# Altium PCB Siren.PcbDoc
Units mil, origin at the board's own origin, x right, y up, seen from the top; angles counter-clockwise.
Board outline 2080 x 1930 mil, 4 copper layers (Top Layer, Internal Plane 1, Internal Plane 2, Bottom Layer), stack 30.634 mil thick; 42 components, 27 nets, 172 pads, 44 vias.
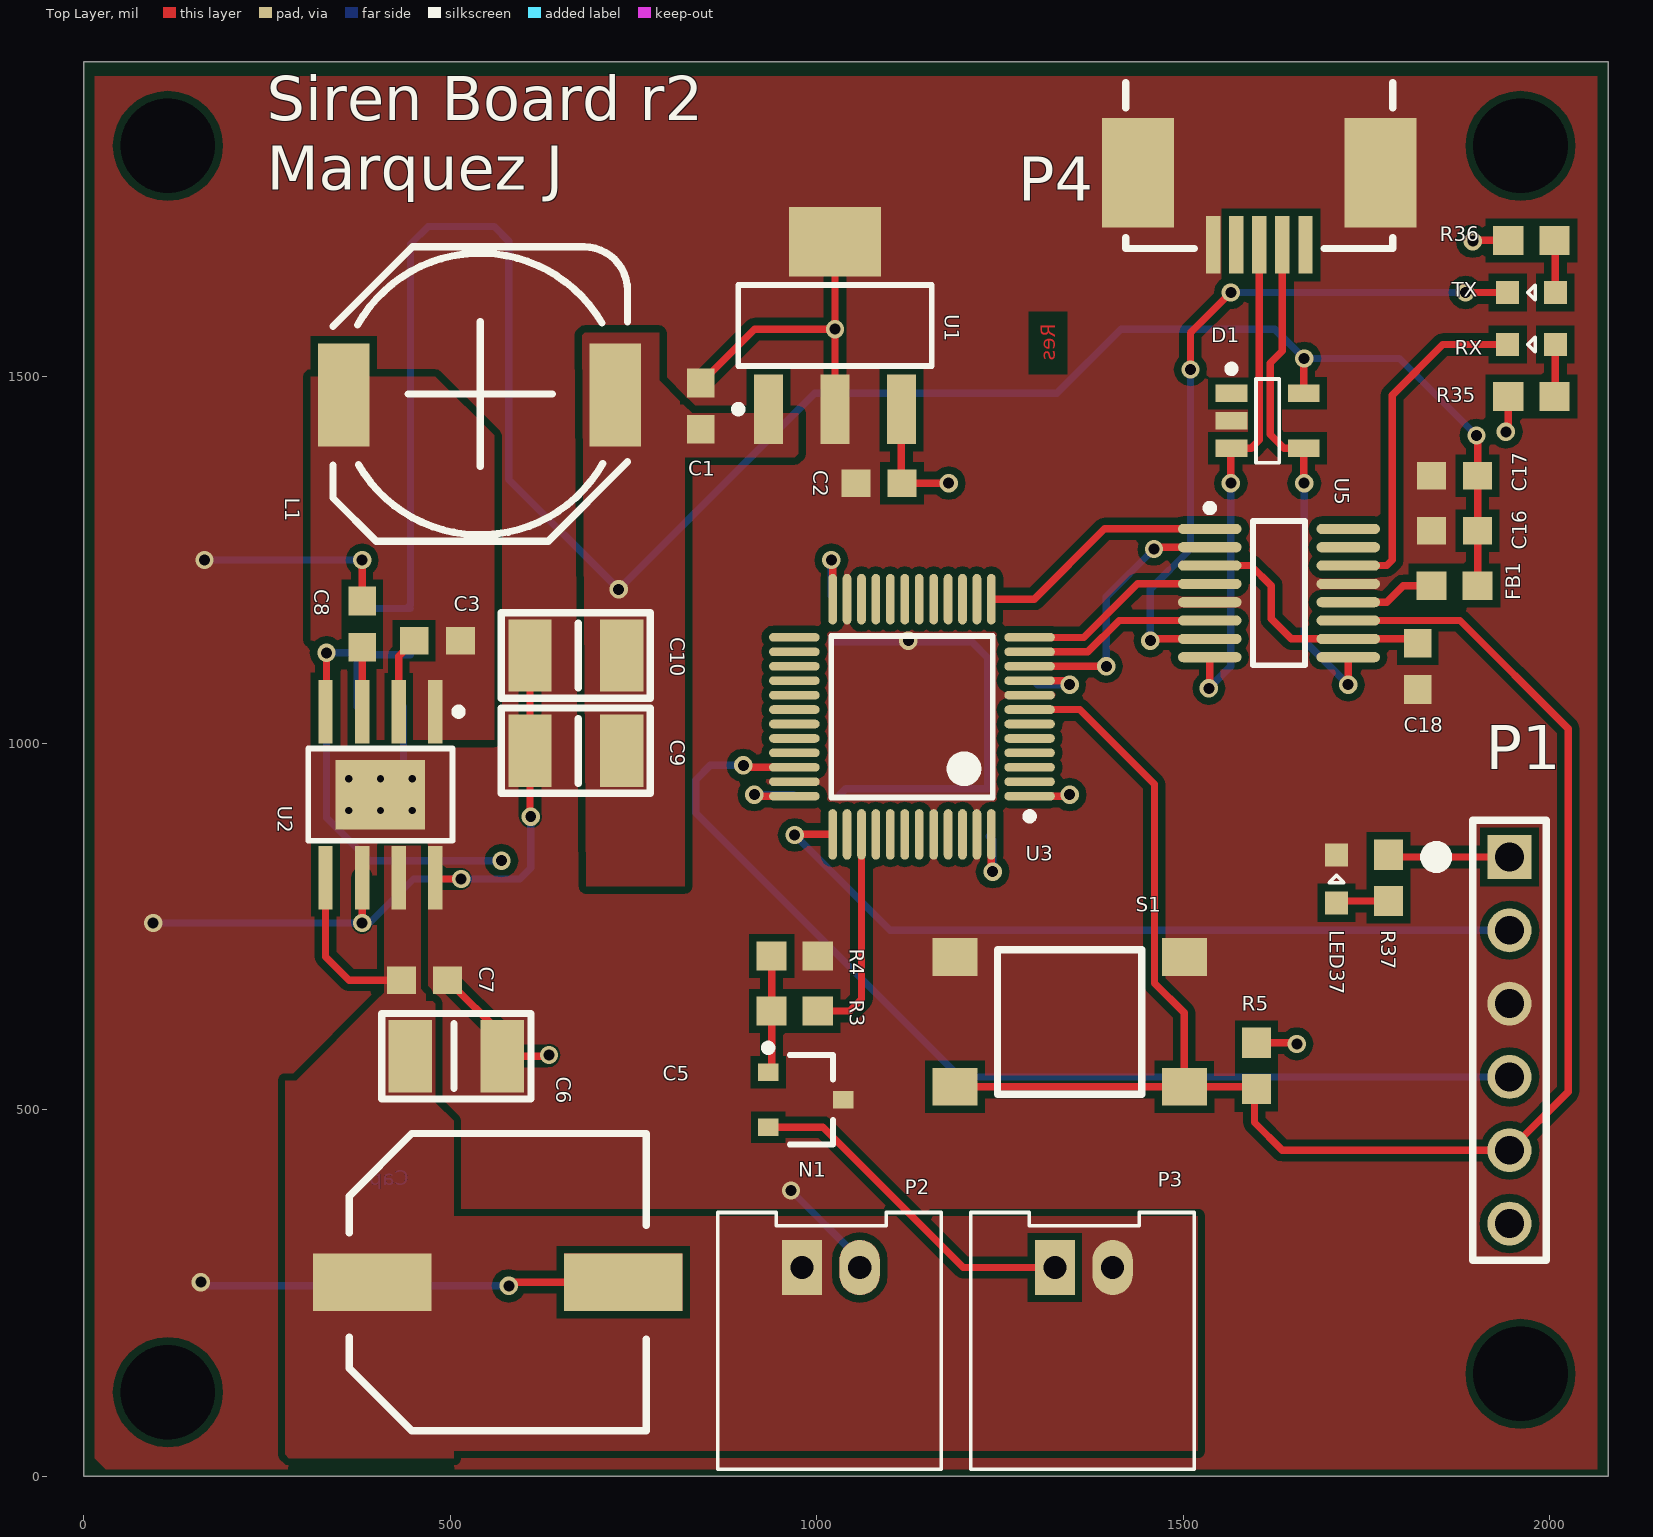
[diagram p0: Top Layer view]
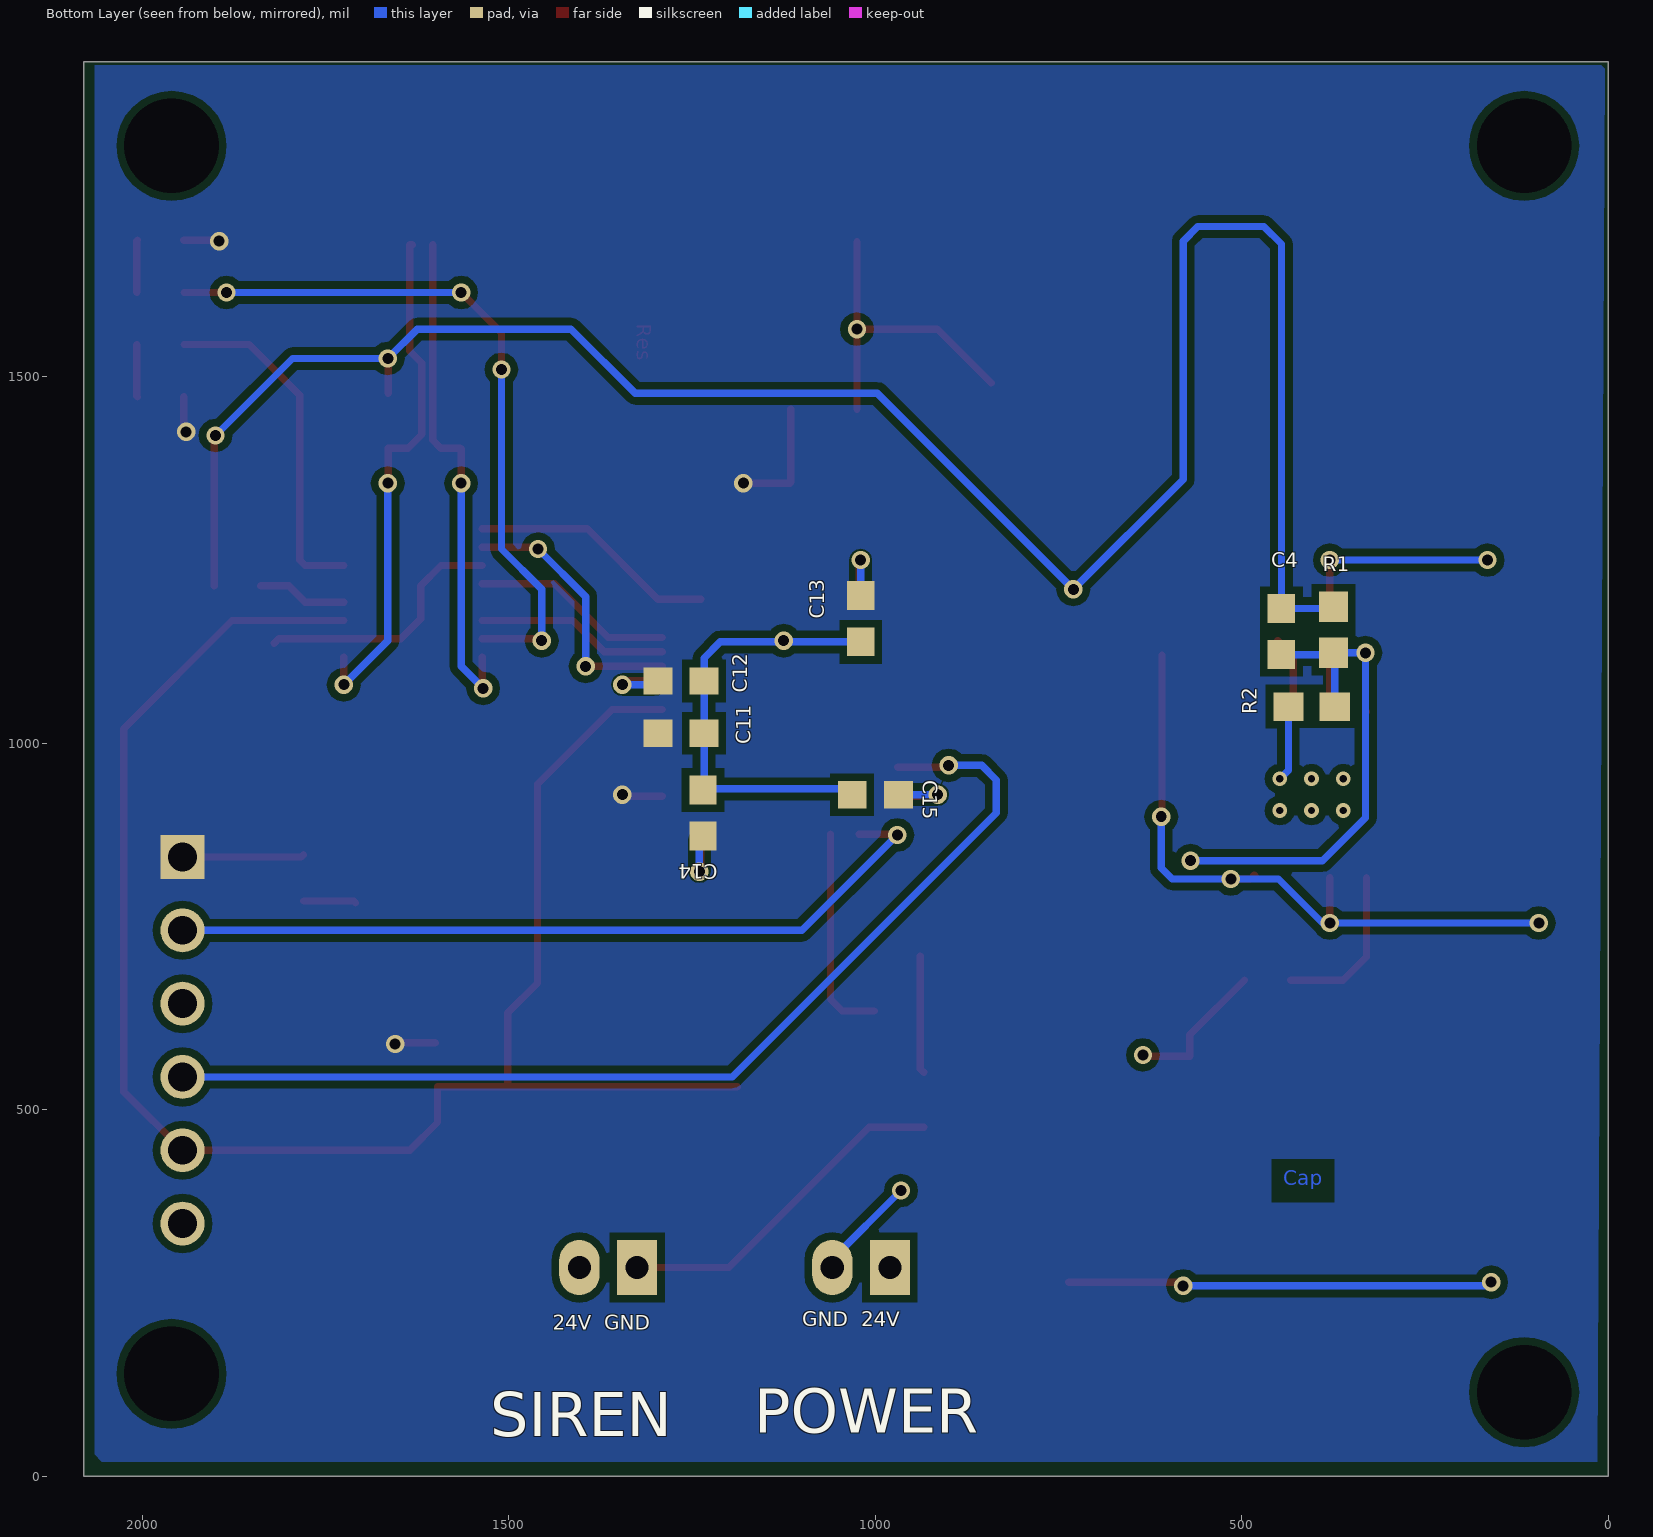
[diagram p1: Bottom Layer view, seen from below]
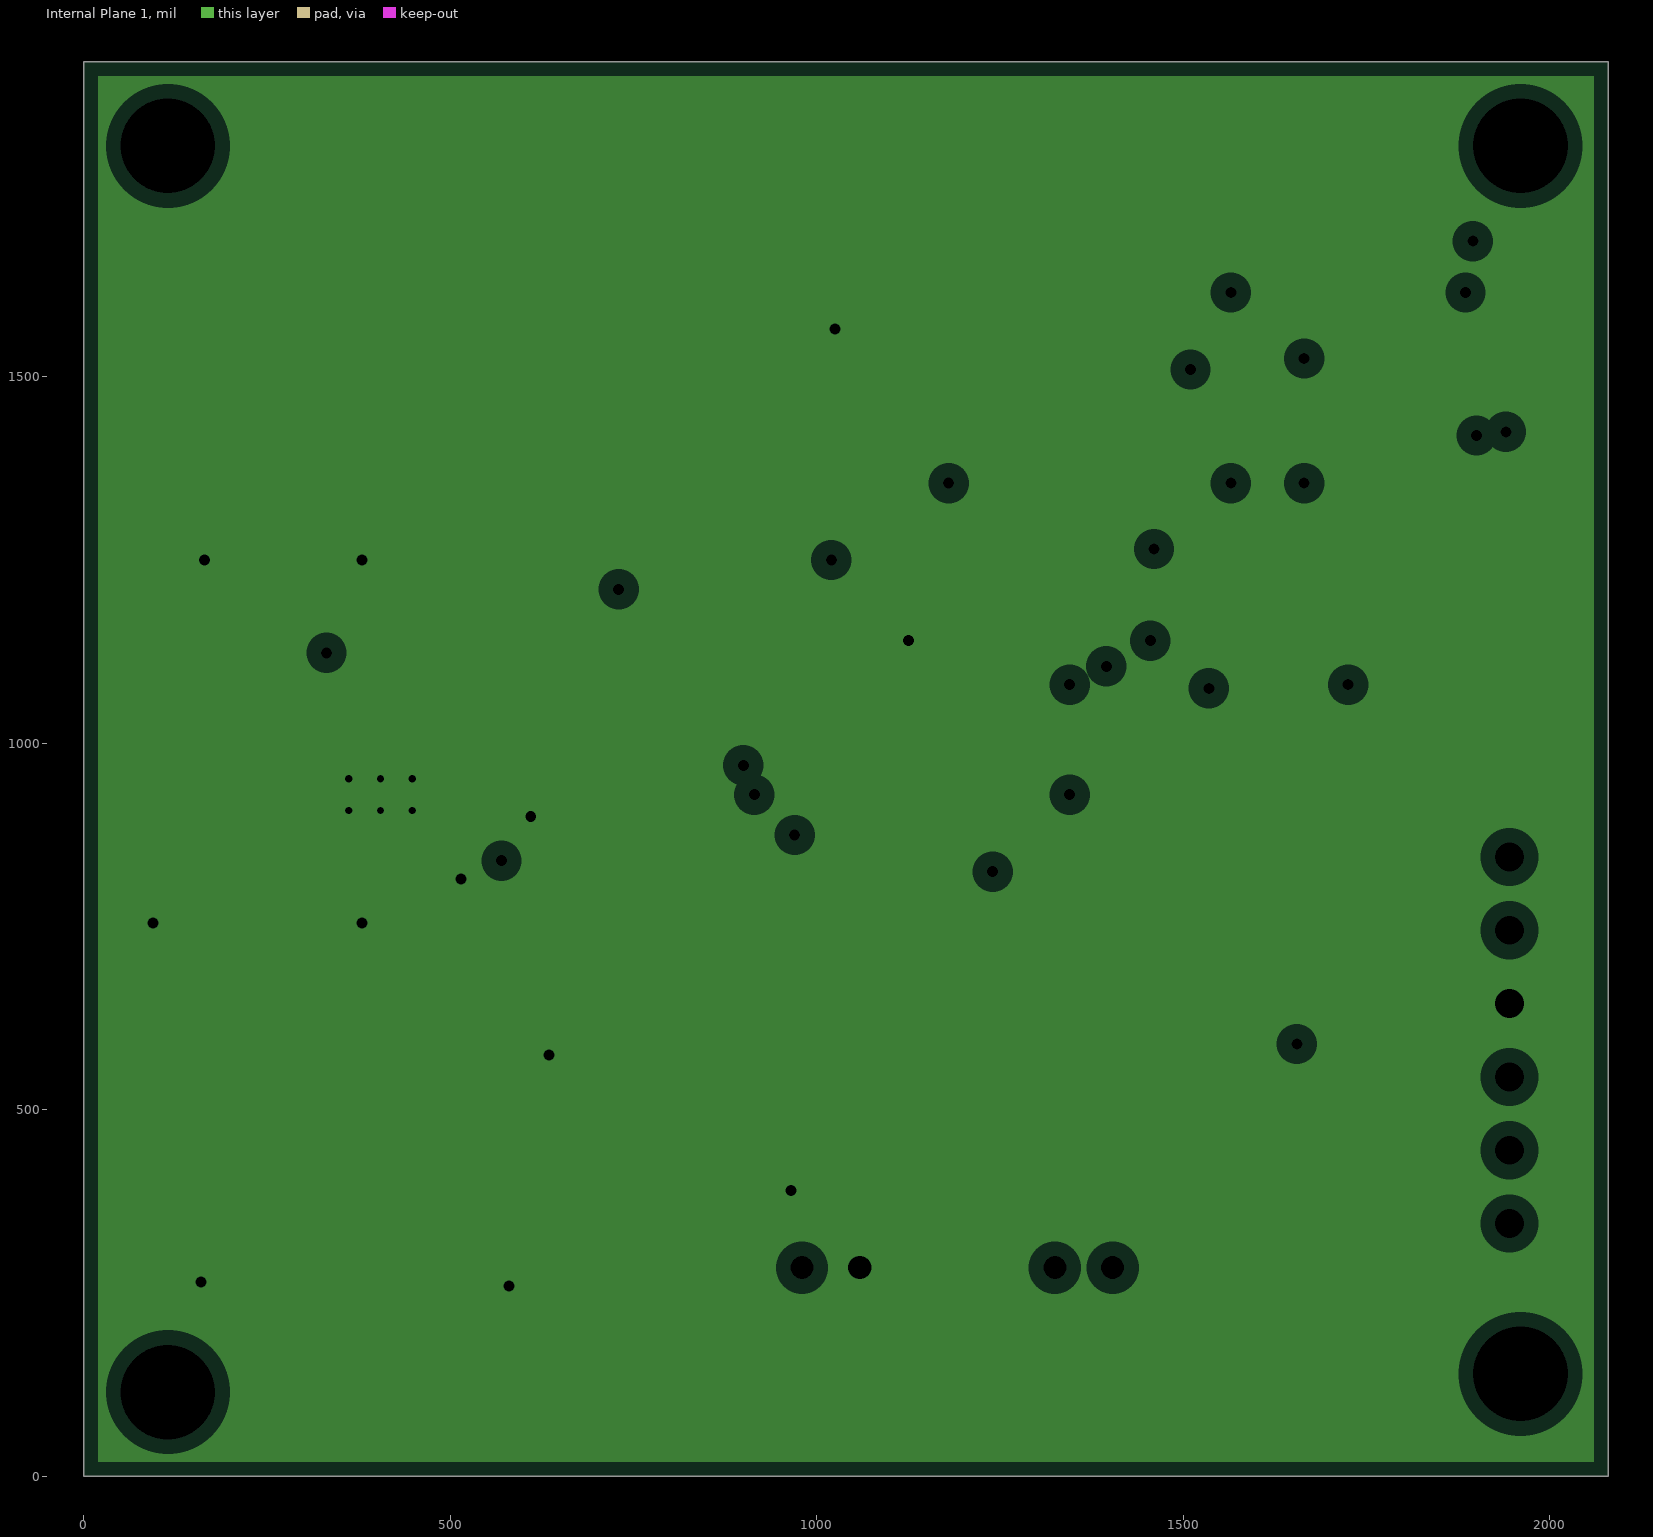
[diagram p2: Internal Plane 1, clearances drawn from the general rule]
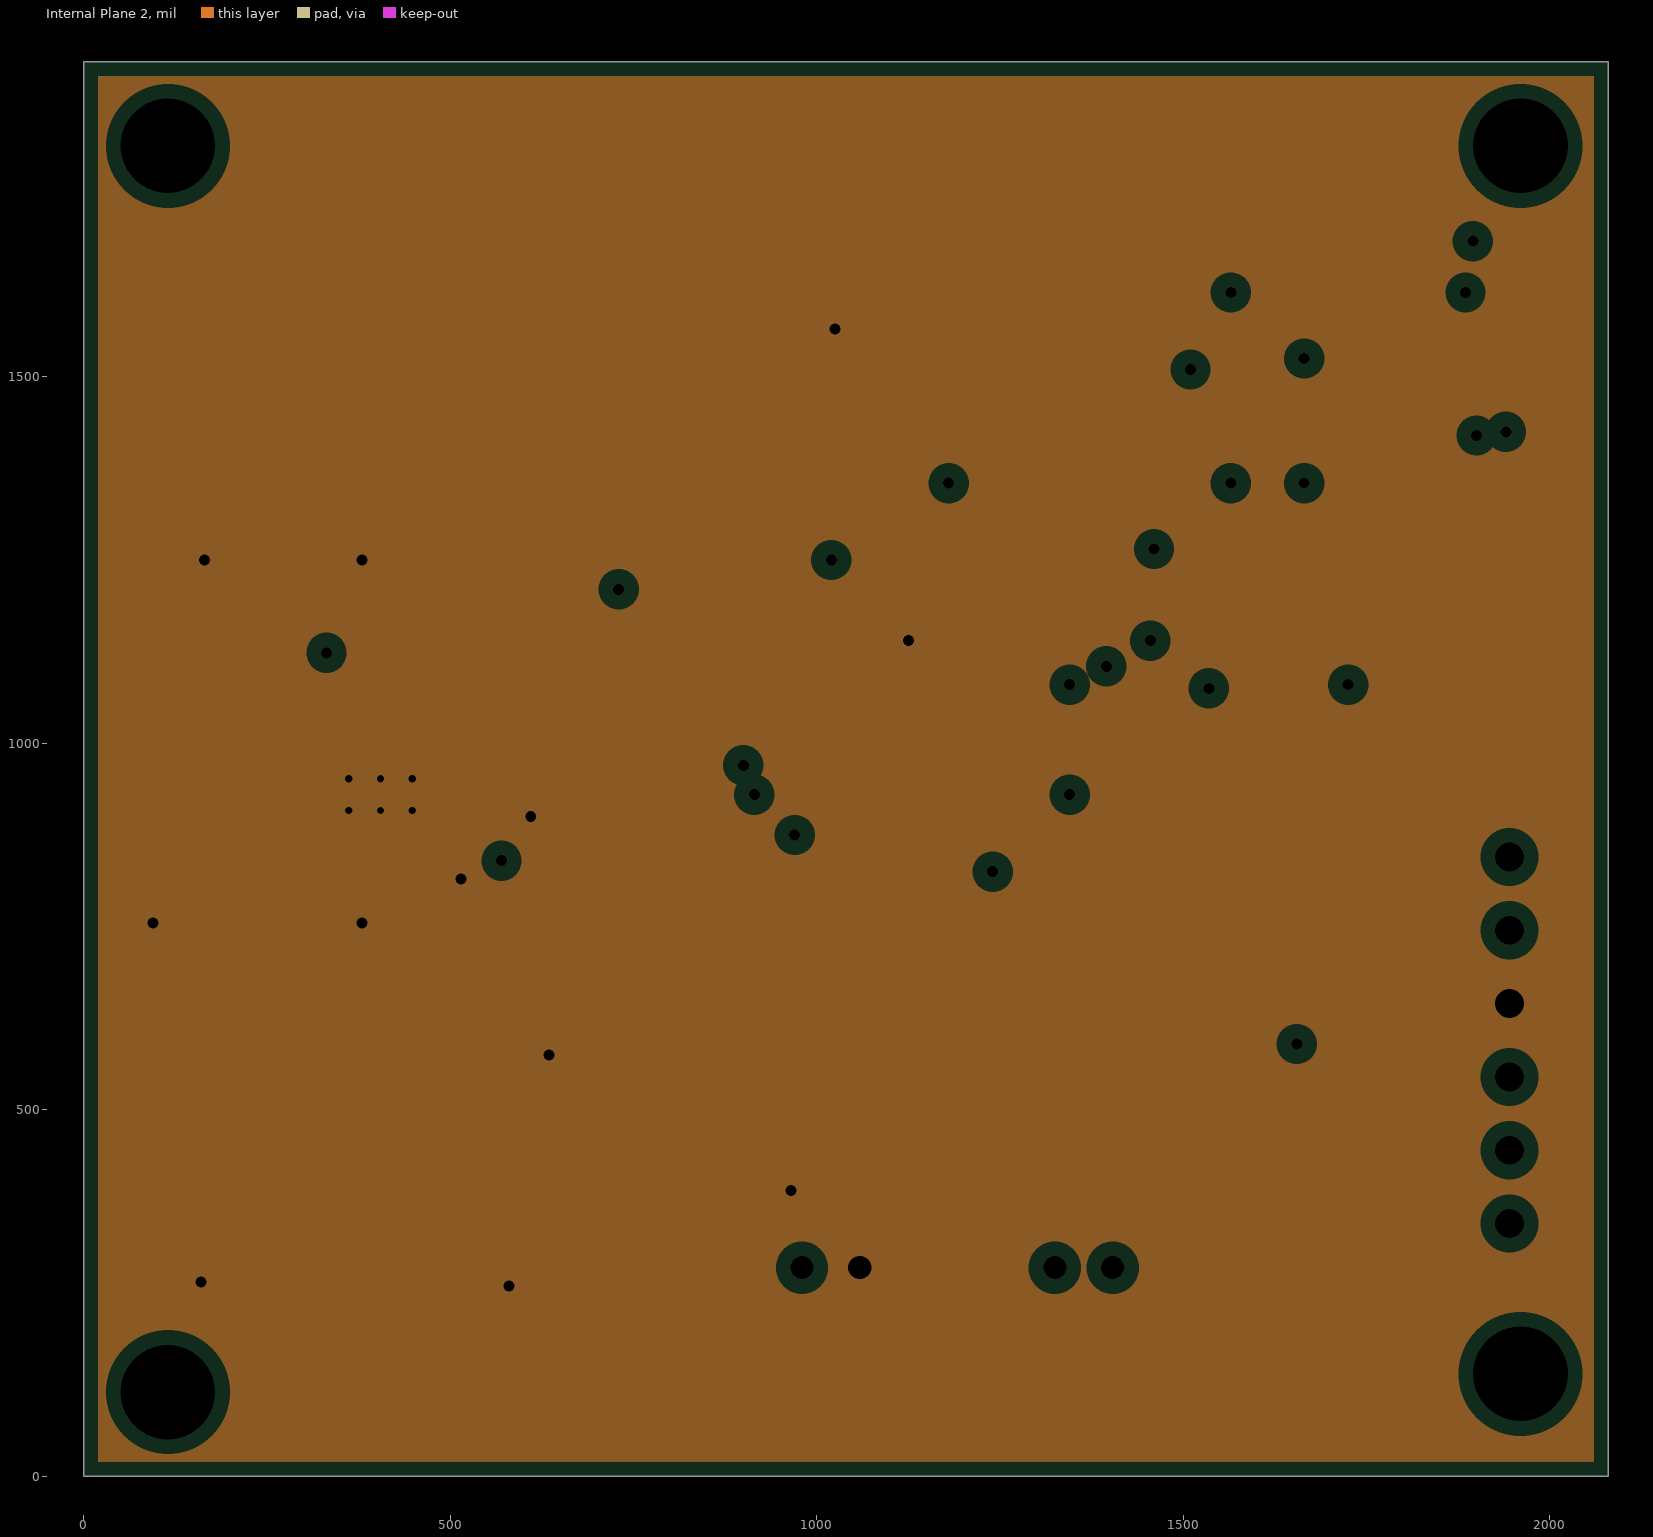
[diagram p3: Internal Plane 2, clearances drawn from the general rule]

## Layer stack, top to bottom
Top Solder: solder mask 0.4, Solder Resist, Dk 3.5
Top Layer: signal copper 1.4
Dielectric 1: core 10, FR-4, Dk 4.2
Internal Plane 1: plane copper 1.417, net GND
Dielectric 3: prepreg 5, Dk 4.2
Internal Plane 2: plane copper 1.417, net GND
Dielectric 2: core 10, Dk 4.2
Bottom Layer: signal copper 1.4
Bottom Solder: solder mask 0.4, Solder Resist, Dk 3.5

## Board outline
2080,1930 0,1930 0,0 2080,0

## Design rules (kind name [scope] priority, off if disabled: settings)
Clearance [All] p1: gap=10 ignorepadtopadclearanceinfootprint=FALSE except(0: Arc-Hole Track-Hole SMDPad-Hole THPad-Hole Via-Hole Fill-Hole Poly-Hole Region-Hole Text-Hole; 5: Track-Track Track-SMDPad SMDPad-SMDPad; 7: Track-Via)
HoleSize [All] p1: absolutevalues=TRUE maxlimit=150 minlimit=10 maxpercent=80.000 minpercent=20.000
MinimumAnnularRing [All] p1: minimumring=5
MinimumSolderMaskSliver [All] p1: minsoldermaskwidth=1
PlaneClearance [All] p1: clearance=20
PlaneConnect [All] p1: planeconnectstyle=Relief reliefexpansion=20 reliefentries=4 reliefconductorwidth=10 reliefairgap=10
PolygonConnect [All] p1: connectstyle=Direct reliefconductorwidth=10 reliefentries=4 polygonreliefangle="90 Angle" airgapwidth=10
RoutingVias [All] p1: holewidth=10 width=22 viastyle="Through Hole" minholewidth=10 minwidth=22 maxholewidth=100 maxwidth=150
SilkToSolderMaskClearance [IsPad] p1: minsilkscreentomaskgap=5 clearancetoexposedcopper=TRUE
SolderMaskExpansion [All] p1: expansion=4
Width [All] p1: maxlimit=150 minlimit=8 preferedwidth=10
25 further rules are at their usual default settings.

## Classes and differential pairs
component class Siren_Board: C11 C12 C13 C14 C15 C16 C17 C18 D1 FB1 LED37 N1 P1 P3 P4 R3 R4 R5 R35 R36 R37 RX S1 TX U3 U5
component class 24Vto5Vat1A-R1: C3 C5 C6 C7 C8 C9 C10 L1 P4 R1 R2 U2
component class 5Vto3V3_Power_Connector: C1 C2 U1

## Components (designator, comment, footprint, x,y, rotation, side; value= is the part's Value field where it differs from the comment)
C1 "Cap" CAPC0603 841.76,1460 r90 top value=1uF
C2 "Cap" CAPC0603 1085,1355 r180 top value=1uF
C3 "Cap" CAPC0603 482.53,1140 r0 top value=470nF
C4 "Cap" CAPC0603 446.03,1152.53 r270 bottom
C5 "EEHZA1H101P" EEHZA1H101P 565,265 r90 top value=100uF
C6 "Cap" CAP1210 445,573.28 r180 top value=10uF
C7 "Cap" CAPC0603 465,677.07 r0 top value=100nF
C8 "Cap" CAPC0603 380,1162.51 r90 top value=10uF
C9 "Cap" CAP1210 735,990 r0 top value=47uF
C10 "Cap" CAP1210 735,1120 r0 top value=47uF
C11 "Cap" CAPC0603 1265,1013.97 r180 bottom value=1uF
C12 "Cap" CAPC0603 1265,1085 r180 bottom value=10nF
C13 "Cap" CAPC0603 1020,1170 r270 bottom value=100nF
C14 "Cap" CAPC0603 1235,905 r90 bottom value=100nF
C15 "Cap" CAPC0603 1000,930 r0 bottom value=100nF
C16 "Cap" CAPC0603 1870,1290 r180 top value=4.7uF
C17 "Cap" CAPC0603 1870,1365 r180 top value=100nF
C18 "Cap" CAPC0603 1820,1105 r270 top value=100nF
D1 "824011" SOT95P280X116-5N 1615,1440 r0 top
FB1 "FBead" RES0603 1870,1215 r180 top
L1 "MSS1048-563MLB" MSS1048-563MLB 540,1475 r90 top value=56uH
LED37 "LED" LED0603 1708.97,815 r90 top
N1 "SSM3K329R,LF" SSM3K329R,LF 985,513.77 r0 top
P1 "SWD" SWD_STM32 1945,845 r0 top
P2 "2-pin Horz Sherlock" MOLEX-HDR-1X2-SHERLOCK-HORZ 980,285 r180 top
P3 "2-pin Horz Sherlock" MOLEX-HDR-1X2-SHERLOCK-HORZ 1325,285 r180 top
P4 "UX60SC-MB-5ST" UX60SC-MB-5ST 1603.75,1680 r180 top (schematic designator P1)
R1 "Res" RES0603 375,1155 r270 bottom value=40.2k
R2 "Res" RES0603 405,1050 r0 bottom value=10k
R3 "Res" RES0603 970,635 r180 top value=100
R4 "Res" RES0603 970,710 r0 top value=10k
R5 "Res" RES0603 1600,560 r270 top value=1k
R35 "Res" RES0603 1975,1472.93 r0 top value=10k
R36 "Res" RES0603 1975,1686.03 r0 top value=10k
R37 "Res" RES0603 1780,816.5 r270 top value=10k
RX "LED" LED0603 1975,1543.97 r180 top
S1 "Button" PTS645xxxxSMTR92 1345,620 r180 top
TX "LED" LED0603 1975,1615 r180 top
U1 "3.3V LDO Reg" SOT23-4n 1025,1570 r90 top
U2 "LMR23610ADDAR" LMR23610ADDAR 405,930 r270 top
U3 "STM32F072CB" STM32F072CB 1130,1036.23 r180 top
U5 "FT230XS" FT230XS 1630.64,1205 r0 top

## Footprints (in the part's own frame and the unit in brackets; to place one, negate y for a bottom-side part, rotate by r counter-clockwise, add the part's x,y. Pads: shape width x height; smd on the part's side, far side on the other; paste and mask are expansions set on the pad)
CAP1210 [mm]
  rect 1.5x2.5 smd: 1(-0.02,0) 2(-3.2,0)
  silkscreen extent -4.2,-1.48 0.97,1.48, body extent -3.22,-1.25 0,1.26, height 2.5
CAPC0603 [mm] "Chip Capacitor, 2-Leads, Body 1.60x0.80mm, IPC Medium Density"
  rect 1x0.95 smd: 1(-0.8,0) 2(0.8,0)
  body extent -0.88,-0.48 0.87,0.48, height 0.8
EEHZA1H101P [mm] "CAP ALUM POLY HYB 100UF 50V SMD"
  rect 2x4.1 smd: 1(0,4.35) 2(0,-4.35)
  silkscreen extent -5.15,-5.15 5.15,5.15, body extent -5.24,-5.99 5.25,5.99, height 10.54
FT230XS [mm] "SOP, 16-Leads, Body 4.90x3.90mm, Pitch 0.64mm, IPC Medium Density"
  oval 2.2x0.35 smd: 1(-2.4,2.222) 2(-2.4,1.587) 3(-2.4,0.953) 4(-2.4,0.318) 5(-2.4,-0.318) 6(-2.4,-0.953) 7(-2.4,-1.587) 8(-2.4,-2.222) 9(2.4,-2.222) 10(2.4,-1.587) 11(2.4,-0.953) 12(2.4,-0.318) 13(2.4,0.318) 14(2.4,0.953) 15(2.4,1.587) 16(2.4,2.222)
  silkscreen extent -2.52,-2.5 0.9,3.07, body extent -2,-2.5 2,2.5, height 1.76
LED0603 [mm] "Chip LED, 2-Leads, Body 1.60x0.80mm, IPC Medium Density"
  rect 0.8x0.8 smd: A(-0.825,0) C(0.825,0)
  silkscreen extent -0.13,-0.25 0.12,0.25, body extent -0.88,-0.48 0.87,0.47, height 0.8
LMR23610ADDAR [mm] "IC REG BUCK ADJ 1A SYNC 8SOPWRPD"
  rect 2.2x0.5 smd: 1(-2.875,1.905) 2(-2.875,0.635) 3(-2.875,-0.635) 4(-2.875,-1.905) 5(2.875,-1.905) 6(2.875,-0.635) 7(2.875,0.635) 8(2.875,1.905)
  rect 2.4x3.1 smd: 9(0,0)
  silkscreen extent -3,-2.5 1.6,2.83, body extent -2,-2.5 2,2.5, height 1.7
MOLEX-HDR-1X2-SHERLOCK-HORZ [mm]
  rect 1.397x1.905 hole 0.8: 1(0,0)
  oval 1.397x1.905 hole 0.8: 2(-2,0)
  silkscreen extent -4.83,-1.91 2.92,6.98, body extent -4.83,-1.91 2.87,8.59, height 5.54
MSS1048-563MLB [mm] "FIXED IND 56UH 1.7A 126 MOHM"
  rect 3.56x1.78 smd: 1(0,4.7) 2(0,-4.7)
  silkscreen extent -5.06,-5.13 5.14,5.07, body extent -5.1,-5.15 5.1,5.15, height 5
PTS645xxxxSMTR92 [mm] "PTS645 Series SMT 6 mm Tactile Switch"
  rect 1.555x1.3 smd: A(-3.975,-2.25) A(3.975,-2.25) B(-3.975,2.25) B(3.975,2.25)
  silkscreen extent -2.5,-2.5 2.5,2.5, body extent -3,-3 3,3, height 4.5
RES0603 [mm] "Chip Resistor, 2-Leads, Body 1.60x0.80mm, IPC Medium Density"
  rect 1.05x1 smd: 1(-0.8,0) 2(0.8,0)
  body extent -0.88,-0.48 0.87,0.47, height 0.8
SOT23-4n [mm] "SOT223, 4-Leads, Body 6.50x7.00mm (avg), Pitch 2.30mm, IPC Medium Density"
  rect 2.4x1 smd: 1(-2.9,2.3) 2(-2.9,0) 3(-2.9,-2.3)
  rect 2.4x3.2 smd: 4(2.9,0)
  silkscreen extent -3.02,-3.35 1.4,3.47, body extent -1.85,-3.35 1.85,3.35, height 1.7
SOT95P280X116-5N [mm] "SOT23, 5-Leads, Body 2.90x2.80mm, Pitch 0.95mm, IPC Medium Density"
  rect 1.1x0.6 smd: 1(-1.25,0.95) 2(-1.25,0) 3(-1.25,-0.95) 4(1.25,-0.95) 5(1.25,0.95)
  silkscreen extent -1.37,-1.45 0.4,1.92, body extent -0.8,-1.45 0.8,1.45, height 1.16
SSM3K329R,LF [mm] "MOSFET N CH 30V 3.5A 2-3Z1A"
  rect 0.7x0.6 smd: 1(-1.3,0.95) 2(-1.3,-0.95) 3(1.3,0)
  silkscreen extent -1.42,-1.55 0.95,1.92, body extent -0.95,-1.55 0.95,1.55, height 0.8
STM32F072CB [mm] "TSQFP, 48-Leads, Body 7.00x7.00mm, Pitch 0.50mm, IPC Medium Density"
  oval 1.75x0.3 smd: 1(-4.075,2.75) 2(-4.075,2.25) 3(-4.075,1.75) 4(-4.075,1.25) 5(-4.075,0.75) 6(-4.075,0.25) 7(-4.075,-0.25) 8(-4.075,-0.75) 9(-4.075,-1.25) 10(-4.075,-1.75) 11(-4.075,-2.25) 12(-4.075,-2.75) 25(4.075,-2.75) 26(4.075,-2.25) 27(4.075,-1.75) 28(4.075,-1.25) 29(4.075,-0.75) 30(4.075,-0.25) 31(4.075,0.25) 32(4.075,0.75) 33(4.075,1.25) 34(4.075,1.75) 35(4.075,2.25) 36(4.075,2.75)
  oval 0.3x1.75 smd: 13(-2.75,-4.075) 14(-2.25,-4.075) 15(-1.75,-4.075) 16(-1.25,-4.075) 17(-0.75,-4.075) 18(-0.25,-4.075) 19(0.25,-4.075) 20(0.75,-4.075) 21(1.25,-4.075) 22(1.75,-4.075) 23(2.25,-4.075) 24(2.75,-4.075) 37(2.75,4.075) 38(2.25,4.075) 39(1.75,4.075) 40(1.25,4.075) 41(0.75,4.075) 42(0.25,4.075) 43(-0.25,4.075) 44(-0.75,4.075) 45(-1.25,4.075) 46(-1.75,4.075) 47(-2.25,4.075) 48(-2.75,4.075)
  silkscreen extent -4.2,-2.8 2.8,3.57, body extent -3.5,-3.5 3.5,3.5, height 1.6
SWD_STM32 [mil] "SWD connector matching the pinout on STM Discovery Boards"
  rect 60x60 hole 39.37: 1(0,0)
  round 60 hole 39.37: 2(0,-100) 3(0,-200) 4(0,-300) 5(0,-400) 6(0,-500)
  silkscreen extent -110,-550 50,50
UX60SC-MB-5ST [mm] "USB Mini-B Recepticle"
  rect 0.5x2 smd: 1(-1.6,0) 2(-0.8,0) 3(0,0) 4(0.8,0) 5(1.6,0)
  rect 2.5x3.8 smd: SHD(-4.2,-2.5) SHD(4.2,-2.5)
  silkscreen extent -4.62,-5.63 4.62,0.13, body extent -4.9,-6.61 4.9,0.39, height 3.95

## Part data
C1 C2 C3 C6 C7 C8 C13 C14 C15 C17 C18: Supplier Part Number 1=1276-1000-1-ND, Supplier 1=Digi-Key
C5: "CAP ALUM POLY HYB 100UF 50V SMD", Manufacturer 1=Panasonic, Supplier Part Number 1=P15442CT-ND, Tolerance=20%, Voltage=50V, ComponentLink1Description="Web Site", ComponentLink1URL=https://na.industrial.panasonic.com/products/capacitors/aluminum-electrolytic-capacitors/conductive-polymer-hybrid-aluminum-electrolytic/series/za-high-temp-reflow/ABA0135/model/EEHZA1H101P, ComponentLink2Description="Data Sheet", ComponentLink2URL=https://industrial.panasonic.com/cdbs/www-data/pdf/RDD0000/ABA0000C1221.pdf, ComponentLink3Description="ZA Series Technical Data", ComponentLink3URL=https://industrial.panasonic.com/cdbs/www-data/pdf/RDD0000/ABA0000COS44.pdf, Manufacturer Part Number 1=EEHZA1H101P, Supplier 1=Digi-Key
C9 C10: Supplier Part Number 1=490-6538-1-ND, Supplier 1=Digi-Key
C16: Supplier Part Number 1=311-1455-1-ND, Supplier 1=Digi-Key
D1: "USB ESD Protection Diodes"
FB1: "Ferrite Bead", Supplier Part Number 1=445-2988-1-ND, Supplier 1=Digi-Key
L1: "FIXED IND 56UH 1.7A 126 MOHM", Manufacturer 1=Coilcraft, ComponentLink1Description="Web Site", ComponentLink1URL=https://www.coilcraft.com/mss1048.cfm, Manufacturer Part Number 1=MSS1048-563MLB, Supplier 1=Coilcraft, Supplier Part Number 1=MSS1048-563MLB
LED37 RX TX: Color=Red, Supplier Part Number 1=754-1122-1-ND, Supplier 1=Digi-Key
N1: "MOSFET N CH 30V 3.5A 2-3Z1A", Manufacturer 1="Toshiba Semiconductor and Storage", Supplier Part Number 1=SSM3K329RLFTR-ND, Manufacturer Part Number 1=SSM3K329R,LF, Supplier 1=Digi-Key
P1: library part SWD_STM32, "SWD connector matching the pinout on STM Discovery Boards"
P2 P3: library part MOLEX-HDR-1x2-SHERLOCK_RA, "Header, Molex, 2mm Pitch Sherlock Header, Single Row, Horizontal, 2 Circuits, Length 3.3mm,  0353630260", Manufacturer="Molex Inc", Manufacturer Part Number=0353630260, Supplier Part Number 1=WM18931-ND, Supplier 1=Digi-Key
P4: "USB Mini B Metal Shield SMT", Supplier Part Number 1=H11671CT-ND, Supplier 1=Digi-Key
R1: Supplier Part Number 1=RMCF0603FT40K2CT-ND, Supplier 1=Digi-Key
R2 R4 R35 R36 R37: Supplier Part Number 1=RMCF0603JT10K0CT-ND, Supplier 1=Digi-Key
R3: Supplier Part Number 1=311-100LRDKR-ND, Supplier 1=Digi-Key
S1: "SPST Button", Supplier Part Number 1=CKN9087CT-ND, Supplier 1=Digi-Key
U1: library part LM3940IMPX-3.3, "IC REG LDO 3.3V 1A SOT223", Supplier Part Number 1=LM3940IMPX-3.3/NOPBCT-ND, Supplier 1=Digi-Key
U2: "IC REG BUCK ADJ 1A SYNC 8SOPWRPD", Manufacturer 1="Texas Instruments", Supplier Part Number 1=296-47267-1-ND, ComponentLink1Description=Datasheet, ComponentLink1URL=http://www.ti.com/lit/ds/symlink/lmr23610.pdf, ComponentLink2Description="Web Site", ComponentLink2URL=http://www.ti.com/product/LMR23610/description, Manufacturer Part Number 1=LMR23610ADDAR, Supplier 1=Digi-Key
U3: "MCU 32BIT 128KB FLASH 48LQFP", Supplier Part Number 1=497-14645-ND, Supplier 1=Digi-Key
U5: "USB To Basic UART IC", Supplier Part Number 1=768-1154-5-ND, Supplier 1=Digi-Key
C11 C12 R5: Supplier 1=Digi-Key

## Free pads (board coordinates)
  round 60 hole 129: 4(1960,1815) 5(115,1815) 9(115,115) 10(1960,140)

## Via types
v1: diameter 25, hole 15, Top Layer to Bottom Layer, tented both sides, 38 vias
v2: diameter 20, hole 10, Top Layer to Bottom Layer, tented both sides, 6 vias

## Nets (pads, with @x,y where several pads share a name; then routed paths per layer and width w, separated by ;. In a path a pad name is that pad's centre, name@x,y a point inside that pad or via, vN(x,y) a via of type N, cw(c..) or ccw(c..) an arc to the next point about the centre after c; other vN are vias at no path point)
3V3: C2.1 C11.1 C12.1 C13.1 C14.1 C15.1 P1.1 R5.1 R35.1 R36.1 R37.1 U1.3 U3.1 U3.9 U3.24 U3.36 U3.48 | length 964.2
  Top Layer w10: v1(915,930) 917.04,927.96 U3.36 ; v1(1020,1250) 1021.73,1248.27 U3.24 ; U1.3 1115.55,1355.94 C2.1 v1(1180,1355) ; U3.48 1238.27,826.73 v1(1240,825) ; U3.1 1342.96,927.96 v1(1345,930) ; U3.9 1344.56,1085.44 1344.56,1080.44 v1(1345,1080) ; R5.1 1653.5,591.5 v1(1655,590) ; R37.1 1782.99,845 1850,845 P1.1 ; v1(1895,1685) 1896.03,1686.03 R36.1 ; v1(1940,1425) 1943.5,1428.5 R35.1
  Bottom Layer w10: v1(915,930) C15.1 ; C13.1 v1(1020,1250) ; C14.1 1240,868.5 v1(1240,825) ; C12.1 1301.5,1080 v1(1345,1080)
5V: C1.1 C4.1 C9.1 C10.1 C16.1 C17.1 D1.5 FB1.1 L1.2 R1.1 U1.1 | length 2892.1
  Top Layer w10: v1@1660.48,1525 v1(1665,1525) 1664.21,1524.21 D1.5 ; v1(1900,1420) 1901.5,1418.5 C17.1 C16.1 FB1.1
  Bottom Layer w10: R1.1 377.47,1184.03 C4.1 C4.1@443.56,1186.5 ; C4.1@446.03,1188.97 446.03,1681.03 470,1705 560,1705 580,1685 580,1360 v1(730,1210) 997.4,1477.4 1327.4,1477.4 1415,1565 1625,1565 v1(1665,1525) 1795,1525 v1(1900,1420)
24V: C5.1 C6.1 C7.1 P2.1 P3.2 U2.5 U2.7 | length 249.5
  Top Layer w10: U2.5 330,709.13 362.07,677.07 C7.1 ; P2.1@975,275 P2.1@975,300
CTS: U3.10 U5.2 | length 368.7
  Top Layer w10: U3.10 1290.56,1105 v1(1395,1105) ; v1(1460,1265) 1462.5,1267.5 U5.2
  Bottom Layer w10: v1(1395,1105) 1395,1200 v1(1460,1265)
Dminus: D1.4 P4.2 U5.9 | length 705.6
  Top Layer w10: P4.2@1631.5,1680 P4.2@1632.56,1678.94 ; P4.2 1635.24,1535.24 1618.75,1518.75 1618.75,1421.25 1637.4,1402.6 D1.4 1664.21,1355.79 v1(1665,1355) ; v1(1725,1080) 1725.13,1080.13 U5.9
  Bottom Layer w10: v1(1665,1355) 1665,1140 v1(1725,1080)
Dplus: D1.3 P4.3 U5.8 | length 692.2
  Top Layer w10: v1(1535,1075) 1536.15,1076.15 U5.8 ; v1(1565,1355) 1565,1401.81 D1.3 1592.6,1402.6 1603.75,1413.75 P4.3
  Bottom Layer w10: v1(1535,1075) 1565,1105 v1(1565,1355)
GND: C1.2 C2.2 C5.2 C6.2 C7.2 C8.2 C9.2 C10.2 C11.2 C12.2 C13.2 C14.2 C15.2 C16.2 C17.2 C18.2 D1.2 LED37.C N1.3 P1.3 P2.2 P4.5 P4.SHD R2.2 R4.2 S1.A U1.2 U1.4 U2.6 U2.8 U2.9 U3.8 U3.23 U3.35 U3.44 U3.47 U5.5 U5.13 | length 3283
  Top Layer w10: v1(380,755) U2.6 ; C8.2 v1(380,1250) ; U2.8 483.19,820 488.19,815 v1(515,815) ; C7.2 570.98,602.58 C6.2 633.28,573.28 v1(635,575) ; v1(580,260) 585,265 C5.2 ; C10.2 C9.2 609.02,900.98 v1(610,900) ; C1.2 915.27,1565 v1(1025,1565) ; U1.2 v1(1025,1565) ; U1.4 v1(1025,1565)
  Bottom Layer w10: v1(95,755) v1(380,755) 390,755 450,815 v1(515,815) 595,815 610,830 v1(610,900) ; v1(160,265) 165,260 v1(580,260) ; v1(165,1250) v1(380,1250) ; R2.2 436.5,963.46 v2(448.31,951.65) ; v1(965,390) 1058.74,296.26 P2.2 ; C13.2 1211.5,1138.5 1233.5,1116.5 C12.2 C11.2 1233.5,937.99 1039.49,937.99 C15.2
  other v1: 1125,1140
  other v2: 361.69,908.35 405,908.35 448.31,908.35 361.69,951.65 405,951.65
NetC3_1: C3.1 U2.2 | length 105.5
  Top Layer w10: U2.2 430,1118.97 C3.1
NetC3_2: C3.2 L1.1 U2.1
NetC4_2: C4.2 R1.2 R2.1 U2.4 | length 760.6
  Top Layer w10: U2.4 331.5,1044.68 v1(331.5,1123.5)
  Bottom Layer w10: R2.1 373.5,1122.01 374.48,1121.03 C4.2 C4.2@443.56,1123.5 ; R1.2 v1(331.5,1123.5) 331.5,898.5 390,840 v1(570,840)
NetC8_1: C8.1 U2.3 | length 87.8
  Top Layer w10: U2.3 C8.1
NetC18_1: C18.1 U5.3 U5.10 | length 354.1
  Top Layer w10: U5.3 1592.5,1242.5 1620,1215 1620,1170 1647.5,1142.5 U5.10 1814,1142.5 C18.1
NetFB1_2: FB1.2 U5.12 | length 122.7
  Top Layer w10: U5.12 1777.5,1192.5 1800,1215 FB1.2
NetLED37_A: LED37.A R37.2 | length 72.1
  Top Layer w10: LED37.A 1711.45,785 R37.2
NetN1_1: N1.1 R3.2 R4.1 | length 160.8
  Top Layer w10: N1.1 938.5,555.86 R4.1
NetN1_2: N1.2 P3.1 | length 470.4
  Top Layer w10: N1.2 1008.63,476.37 1200,285 P3.1
NetR35_2: R35.2 RX.A | length 71.4
  Top Layer w10: R35.2 2007.48,1473.92 RX.A
NetR36_2: R36.2 TX.A | length 71.4
  Top Layer w10: R36.2 2007.48,1685.05 TX.A
NRST: P1.5 R5.2 S1.B U3.7 U5.11 | length 2432
  Top Layer w10: S1.B@1188.5,531.42 S1.B@1501.5,531.42 ; U3.7 1358.93,1046.07 1460.89,944.11 1460.89,672.99 1501.5,632.38 S1.B@1501.5,531.42 ; U5.11 1877.5,1167.5 2025,1020 2025,525 P1.5 1635,445 1597.09,482.91 1597.09,531.42 S1.B@1501.5,531.42
nRXLED: RX.C U5.14 | length 474.1
  Top Layer w10: U5.14 1777.5,1242.5 1785,1250 1785,1475 1853.97,1543.97 RX.C
nTXLED: TX.C U5.7 | length 980.3
  Top Layer w10: v1(1455,1140) 1457.5,1142.5 U5.7 ; v1(1510,1510) 1510,1560 v1(1565,1615) ; v1(1885,1615) TX.C
  Bottom Layer w10: v1(1455,1140) 1455,1210 1510,1265 v1(1510,1510) ; v1(1565,1615) v1(1885,1615)
RTS: U3.11 U5.6 | length 263.4
  Top Layer w10: U3.11 1369.81,1124.81 1412.5,1167.5 U5.6
SIREN_PIN: R3.1 U3.39 | length 291
  Top Layer w10: R3.1 1045,635 1061.1,651.1 U3.39
SWCLK: P1.2 U3.37 | length 1080.9
  Top Layer w10: v1(970,875) 970.8,875.8 U3.37
  Bottom Layer w10: v1(970,875) 1100,745 P1.2
SWDIO: P1.4 U3.34 | length 1448.1
  Top Layer w10: v1(900,970) 902.67,967.33 U3.34
  Bottom Layer w10: v1(900,970) 855,970 835,950 835,905 1195,545 P1.4
USART_RX: U3.13 U5.1 | length 337.6
  Top Layer w10: U3.13 1296.66,1196.66 1392.5,1292.5 U5.1
USART_TX: U3.12 U5.4 | length 276
  Top Layer w10: U3.12 1364.5,1144.5 1437.5,1217.5 U5.4
pads on no net: D1.1 P1.6 P4.1 P4.4 U3.2 U3.3 U3.4 U3.5 U3.6 U3.14 U3.15 U3.16 U3.17 U3.18 U3.19 U3.20 U3.21 U3.22 U3.25 U3.26 U3.27 U3.28 U3.29 U3.30 U3.31 U3.32 U3.33 U3.38 U3.40 U3.41 U3.42 U3.43 U3.45 U3.46 U5.15 U5.16

## Polygon pours and split planes (outlines as drawn)
GND on Top Layer "GND" (solid, pour order 54): 15,1910 2065,1910 2065,10 30,10 15,25
24V on Top Layer "Vin-24V" (solid, pour order 24): 470,355 1140,355 1520,355 1520,35 480,35
5V on Top Layer "Vout-5V" (solid, pour order 20): 680,1560 785,1560 785,1495 815,1465 830,1450 975,1450 975,1395 970,1390 820,1390 820,805 685.72,805
no net on Top Layer "3V3" (solid, pour order 50): 1025,1830
NetC3_2 on Top Layer "NetC3_2" (solid, pour order 26): 310,1500 310,1005 560,1005 560,1315 560,1420 480,1500
GND on Top Layer "GND" (solid, pour order 46): 1160,860
24V on Top Layer "Vin-24V" (solid, pour order 0): 410,860 410,815 410,775 410,660 400,650 290,540 275,540 275,30 280,25 505,25 505,485 480,510 480,645 465,660 460,665 460,860
3V3 on Bottom Layer "3V3" (solid, pour order 52): 5,1920 10,1925 2065,1925 2065,30 2055,20 15,20
GND on Bottom Layer "GND" (solid, pour order 40): 255,-40
GND on Bottom Layer "GND" (solid, pour order 34): 670,-1095
GND on Bottom Layer "GND" (solid, pour order 30): 125,1830
GND on Internal Plane 1 (split plane): 2059.9,20.1 20.1,20.1 20.1,1909.9 2059.9,1909.9
GND on Internal Plane 2 (split plane): 2059.9,20.1 20.1,20.1 20.1,1909.9 2059.9,1909.9

## Silkscreen, mask and mechanical layers (free items; w line width, h text height)
Top Overlay:
  text "Siren Board r2" at 250,1850 h60
  text "Marquez J" at 250,1755 h60
Bottom Overlay:
  text "GND  24V" at 1100,205 h20
  text "24V  GND" at 1440,200 h20
  text "POWER" at 1165,60 h60
  text "SIREN" at 1525,55 h60
Board Outline:
  the board outline again, w10
Drill Drawing:
  lines w10: 2080,0 0,0 0,1930 2080,1930